# EAGLE board OCU_PCB_Rev3 (EAGLE 9.6.2)
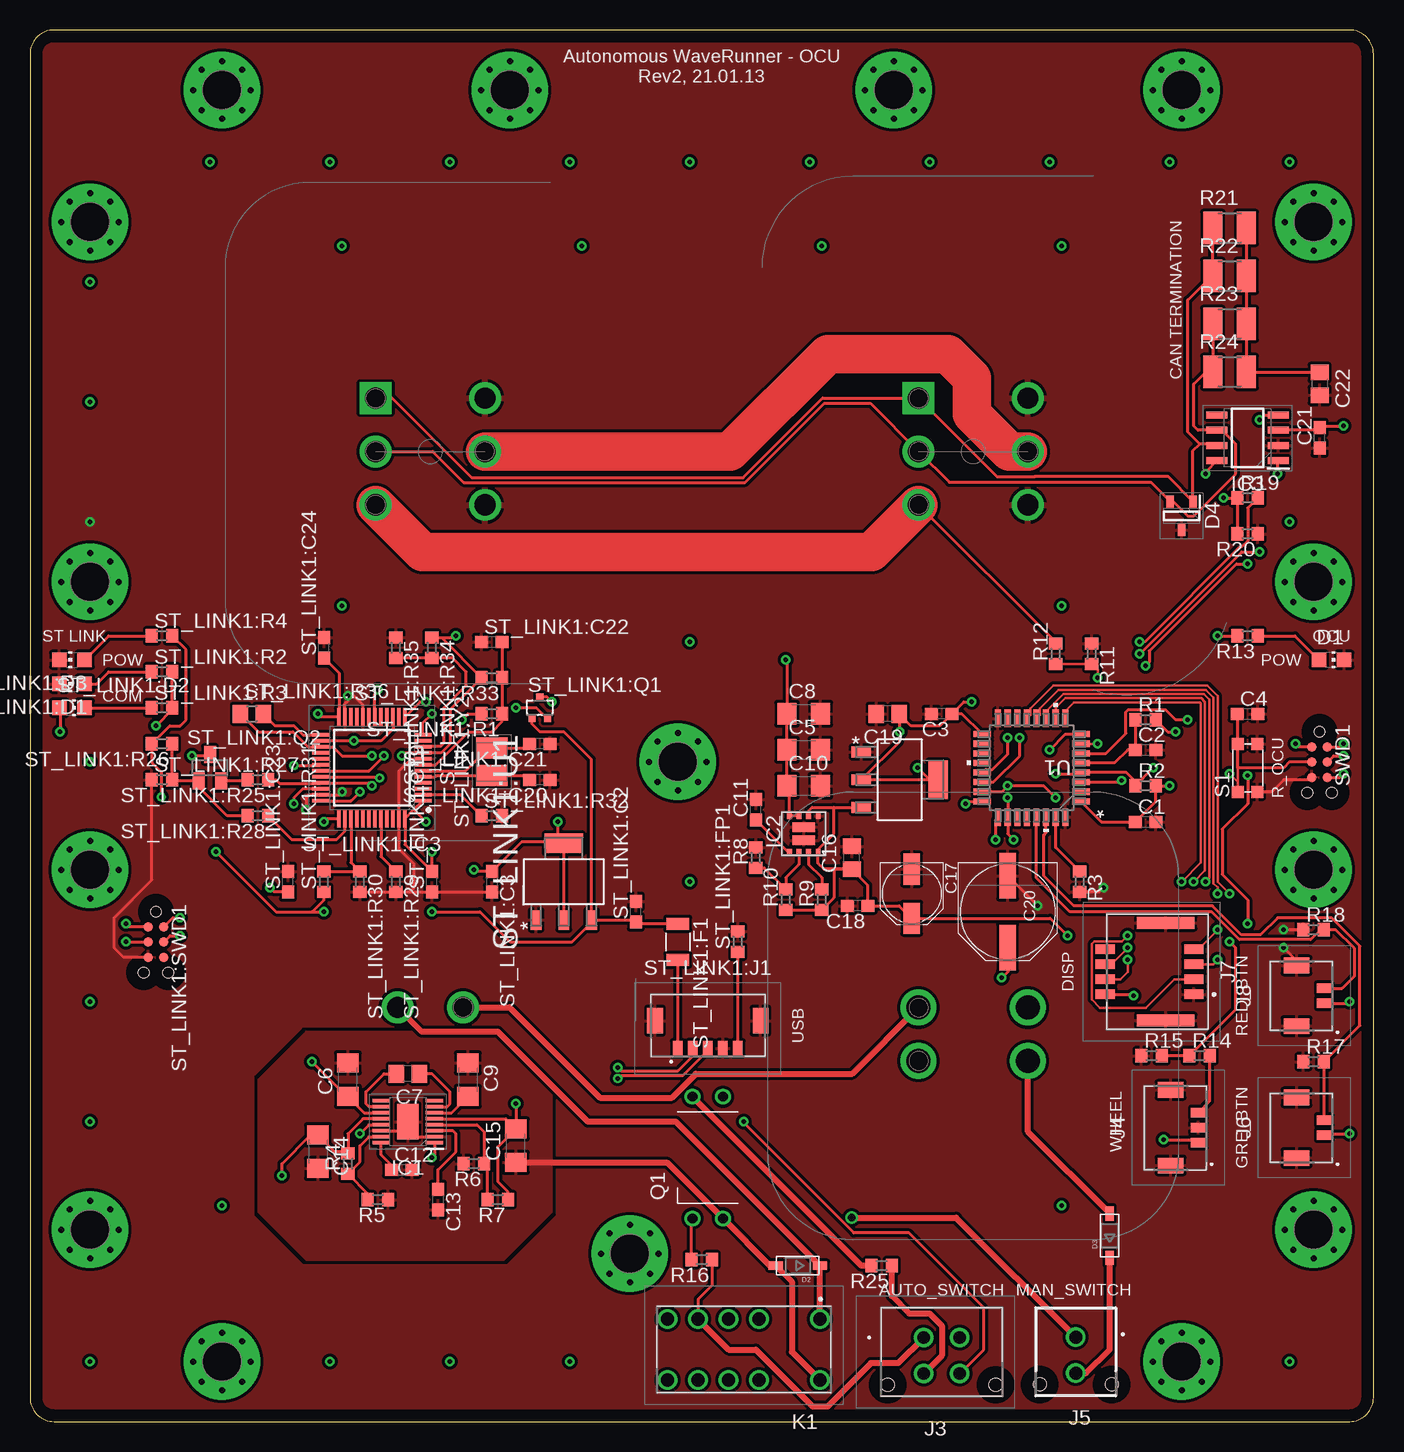
[diagram p0: board, top side]
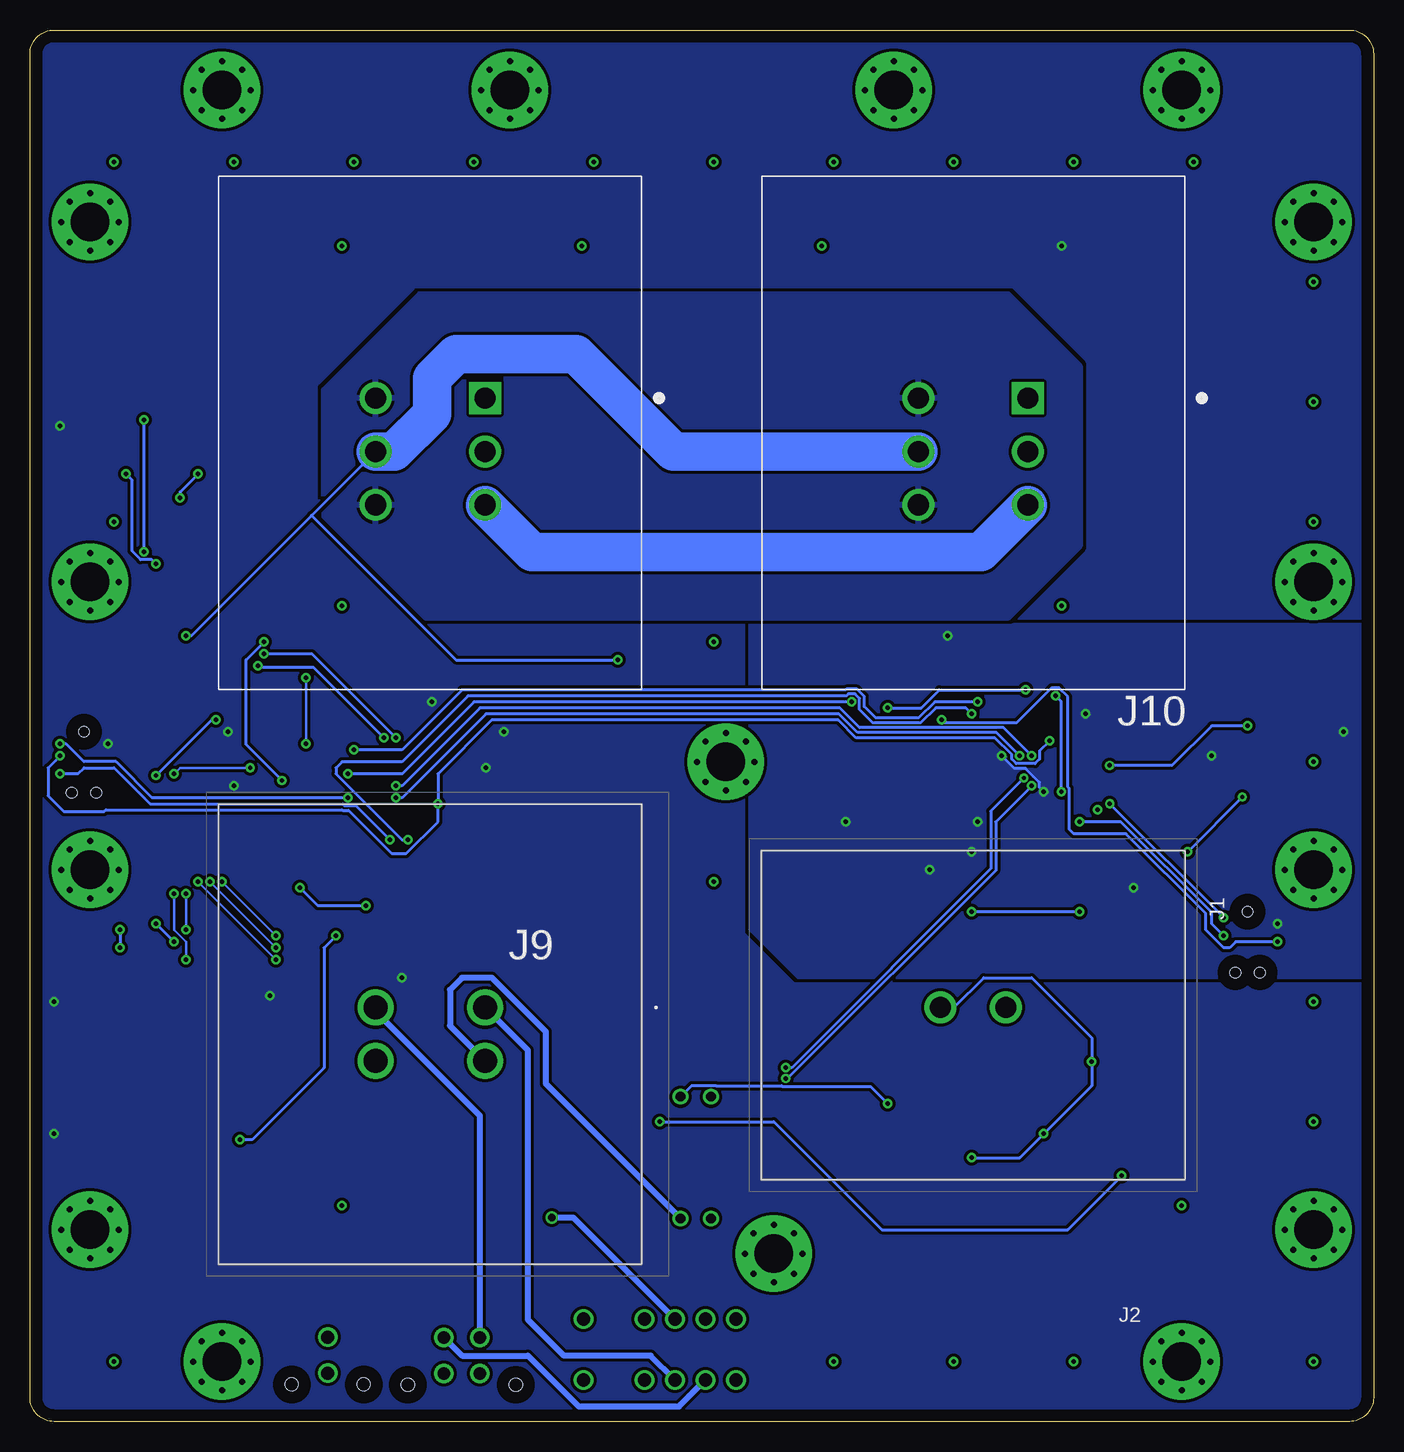
[diagram p1: board, bottom side, seen from below]

Size 112 x 116 mm. Coordinates in mm from the lower left corner, seen from the top.
Outline: 112,114 arc90 110,116 2,116 arc90 0,114 0,2 arc90 2,0 110,0 arc90 112,2 112,114
Copper layers (1*16): Top 0.035mm / dielectric 1.5mm / Bottom 0.035mm
Design rules "default *": minimum track width 6mil, minimum drill 0.35mm, track to track 6mil, track to pad 6mil, pad to pad 6mil, via to via 6mil, smd to smd 6mil, copper to edge 40mil, drill to drill 6mil, minimum pad ring 10mil, minimum via ring 8mil, stop-mask expansion 4mil, vias tented up to drill 0mil, thermal gap 10mil
Net classes: 0 default: width 0.2 mm; 1 DB: width 3.2 mm, clearance 0.254 mm

## Footprints (pad centres in the part's own frame; a part is rotated, then mirrored left to right if it is on the bottom)
C0603 = smd 1.1 x 1: 1 -0.85,0; 2 0.85,0
C1206 = smd 1.6 x 1.8: 1 -1.4,0; 2 1.4,0
C0805 = smd 1.3 x 1.5: 1 -0.95,0; 2 0.95,0
PANASONIC_C = smd 2.6 x 1.4: + 2.05,0; - -2.05,0
PANASONIC_E = smd 3.8 x 1.4: + 3,0; - -3,0
CHIP-LED0805 = smd 1.2 x 1.2: A 0,-1.05; C 0,1.05
SOD-123 = smd 1.2 x 0.7: A 1.85,0; C -1.85,0
SOT96P237X111-3N = smd 1 x 0.6: 1 -1.2,0.955; 2 -1.2,-0.955; 3 1.2,0
M3_MOUNTING_HOLE = drill 0.5 pad 0.8: P$1 -2.4,0; P$2 0,2.4; P$3 2.4,0; P$4 0,-2.4; P$5 -1.697,1.697; P$6 1.697,1.697; P$7 1.697,-1.697; P$8 -1.697,-1.697 | drill 3.2 pad 6.4: P$10 0,0
SOP50P490X110-17N = smd 1.425 x 0.3: 1 -2.212,1.75; 2 -2.212,1.25; 3 -2.212,0.75; 4 -2.212,0.25; 5 -2.212,-0.25; 6 -2.212,-0.75; 7 -2.212,-1.25; 8 -2.212,-1.75; 9 2.212,-1.75; 10 2.212,-1.25; 11 2.212,-0.75; 12 2.212,-0.25; 13 2.212,0.25; 14 2.212,0.75; 15 2.212,1.25; 16 2.212,1.75 | smd 1.753 x 2.947: 17 0,0
SIL0008E = smd 0.45 x 0.4: 1 -1.475,1.2; 2 -1.475,0.4; 3 -1.475,-0.4; 4 -1.475,-1.2; 5 1.475,-1.2; 6 1.475,-0.4; 7 1.475,0.4; 8 1.475,1.2 | smd 0.8 x 1.9: 9 0.55,0; 10 -0.55,0
SOT127P600X175-8N = smd 1.75 x 0.6: 1 -2.55,1.905; 2 -2.55,0.635; 3 -2.55,-0.635; 4 -2.55,-1.905; 5 2.55,-1.905; 6 2.55,-0.635; 7 2.55,0.635; 8 2.55,1.905
DT152P = drill 1.77 pad 2.655: 1 0,0; 2 0,5.46
DT154P = drill 2.01 pad 3.015: 1 0,0; 2 0,4.45; 3 9.12,4.45; 4 9.12,0
430450413 = drill 1.07 pad 1.605: 1 0,0; 2 -3,0; 3 0,3; 4 -3,3 | hole 1.07: -6,3.94; 3,3.94
5055680371 = smd 0.8 x 1.2: 1 -1.25,-1.882; 2 0,-1.882; 3 1.25,-1.882 | smd 1.3 x 2.15: MP1 -3.15,0.412; MP2 3.15,0.412
43045-0213 = drill 1.07 pad 1.62: 1 3.325,2.47; 2 3.325,5.47 | hole 1.07: 0.325,6.41; 6.325,6.41
5055680271 = smd 0.8 x 1.2: 1 -0.625,-1.882; 2 0.625,-1.882 | smd 1.3 x 2.15: MP1 -2.525,0.412; MP2 2.525,0.412
5054330871 = smd 0.8 x 1.6: 1 1.875,3.517; 2 1.875,-3.873; 3 0.625,3.517; 4 0.625,-3.873; 5 -0.625,3.517; 6 -0.625,-3.873; 7 -1.875,3.517; 8 -1.875,-3.873 | smd 1 x 4.8: MP1 4.075,1.177; MP2 -4.075,1.177
TE_DT15-6P = drill 1.77 square: 1 -4.56,-4.45 | drill 1.77: 2 -4.56,0; 3 -4.56,4.45; 4 4.56,4.45; 5 4.56,0; 6 4.56,-4.45
413937885 = drill 1.1 pad 1.65: 1 -6.35,-2.54; 3 -1.27,-2.54; 4 1.27,-2.54; 5 3.81,-2.54; 6 6.35,-2.54; 7 6.35,2.54; 8 3.81,2.54; 9 1.27,2.54; 10 -1.27,2.54; 12 -6.35,2.54
DIL04-400 = drill 0.813 pad 1.3: 1 -1.27,-5.08; 2 1.27,-5.08; 3 1.27,5.08; 4 -1.27,5.08
R0603 = smd 1 x 1.1: 1 -0.85,0; 2 0.85,0
R1210 = smd 1.6 x 2.7: 1 -1.4,0; 2 1.4,0
KMR621NGLFS = smd 1 x 1: 1 -2,-0.8; 2 2,-0.8; 3 -2,0.8; 4 2,0.8
OZCJ = smd 1 x 1.9: 1 -1.5,0; 2 1.5,0
QFP50P900X900X160-48N = smd 1.475 x 0.3: 1 -4.238,2.75; 2 -4.238,2.25; 3 -4.238,1.75; 4 -4.238,1.25; 5 -4.238,0.75; 6 -4.238,0.25; 7 -4.238,-0.25; 8 -4.238,-0.75; 9 -4.238,-1.25; 10 -4.238,-1.75; 11 -4.238,-2.25; 12 -4.238,-2.75; 25 4.238,-2.75; 26 4.238,-2.25; 27 4.238,-1.75; 28 4.238,-1.25; 29 4.238,-0.75; 30 4.238,-0.25; 31 4.238,0.25; 32 4.238,0.75; 33 4.238,1.25; 34 4.238,1.75; 35 4.238,2.25; 36 4.238,2.75 | smd 0.3 x 1.475: 13 -2.75,-4.238; 14 -2.25,-4.238; 15 -1.75,-4.238; 16 -1.25,-4.238; 17 -0.75,-4.238; 18 -0.25,-4.238; 19 0.25,-4.238; 20 0.75,-4.238; 21 1.25,-4.238; 22 1.75,-4.238; 23 2.25,-4.238; 24 2.75,-4.238; 37 2.75,4.238; 38 2.25,4.238; 39 1.75,4.238; 40 1.25,4.238; 41 0.75,4.238; 42 0.25,4.238; 43 -0.25,4.238; 44 -0.75,4.238; 45 -1.25,4.238; 46 -1.75,4.238; 47 -2.25,4.238; 48 -2.75,4.238
5055680571 = smd 0.8 x 1.2: 1 -2.5,-1.882; 2 -1.25,-1.882; 3 0,-1.882; 4 1.25,-1.882; 5 2.5,-1.882 | smd 1.3 x 2.15: MP1 -4.4,0.412; MP2 4.4,0.412
SOT323 = smd 0.6 x 0.55: 1 -0.65,-0.925; 2 0.65,-0.925; 3 0,0.925
SOT23 = smd 1 x 1.4: 1 -0.95,-1.1; 2 0.95,-1.1; 3 0,1.1
R0805 = smd 1.3 x 1.5: 1 -0.95,0; 2 0.95,0
TC2030-IDC-NL = smd 0.787 x 0.787: 1 1.27,-0.635; 2 1.27,0.635; 3 2.54,-0.635; 4 2.54,0.635; 5 3.81,-0.635; 6 3.81,0.635 | hole 0.889: 0,0; 5.08,-1.016; 5.08,1.016
SOT230P700X180-4N = smd 1.626 x 0.889: 1 -3.2,2.311; 2 -3.2,0; 3 -3.2,-2.311 | smd 1.626 x 3.175: 4 3.2,0
RESC3226X100N = smd 1.75 x 2.65: 1 -1.15,0; 2 1.15,0
LQFP-32 = smd 1.473 x 0.508: 1 -4.115,2.8; 2 -4.115,2; 3 -4.115,1.2; 4 -4.115,0.4; 5 -4.115,-0.4; 6 -4.115,-1.2; 7 -4.115,-2; 8 -4.115,-2.8; 17 4.115,-2.8; 18 4.115,-2; 19 4.115,-1.2; 20 4.115,-0.4; 21 4.115,0.4; 22 4.115,1.2; 23 4.115,2; 24 4.115,2.8 | smd 0.508 x 1.473: 9 -2.8,-4.115; 10 -2,-4.115; 11 -1.2,-4.115; 12 -0.4,-4.115; 13 0.4,-4.115; 14 1.2,-4.115; 15 2,-4.115; 16 2.8,-4.115; 25 2.8,4.115; 26 2,4.115; 27 1.2,4.115; 28 0.4,4.115; 29 -0.4,4.115; 30 -1.2,4.115; 31 -2,4.115; 32 -2.8,4.115

## Placement (x,y rotation side)
C1  0.1uF  [C0603]  93,50 0 top
C2  0.1uF  [C0603]  93,56 0 top
C3  0.1uF  [C0603]  76,59 180 top
C4  0.1uF  [C0603]  101.5,59 0 top
C5  10uF  [C1206]  64.5,56 0 top
C6  10uF  [C1206]  26.5,28.5 90 top
C7  1uF  [C0805]  31.5,29 180 top
C8  10uF  [C1206]  64.5,59 0 top
C9  10uF  [C1206]  36.5,28.5 270 top
C10  10uF  [C1206]  64.5,53 0 top
C11  3.3nF  [C0603]  60.5,51 90 top
C12  10nF  [C0603]  31,21 0 top
C13  10nF  [C0603]  34,18.5 270 top
C14  10uF  [C1206]  24,22.5 270 top
C15  10uF  [C1206]  40.5,23 90 top
C16  22uF  [C0805]  68.5,47 90 top
C17  100uF  [PANASONIC_C]  73.5,44 270 top
C18  100nF  [C0603]  69,43 180 top
C19  10uF  [C0805]  71.5,59 180 top
C20  220uF  [PANASONIC_E]  81.5,42.5 270 top
C21  0.1uF  [C0603]  107.5,82 90 top
C22  4.7nF  [C0805]  107.5,86.5 270 top
D1  12V-POW  [CHIP-LED0805]  108.5,63.5 270 top
D2  [SOD-123]  64,13 180 top
D3  [SOD-123]  90,15.5 90 top
D4  SZNUP2105LT1G  [SOT96P237X111-3N]  96,75.5 270 top
HOLE1  M3_MOUNTING_HOLE  [M3_MOUNTING_HOLE]  54,55 0 top
HOLE2  M3_MOUNTING_HOLE  [M3_MOUNTING_HOLE]  5,100 0 top
HOLE3  M3_MOUNTING_HOLE  [M3_MOUNTING_HOLE]  16,111 0 top
HOLE4  M3_MOUNTING_HOLE  [M3_MOUNTING_HOLE]  40,111 0 top
HOLE5  M3_MOUNTING_HOLE  [M3_MOUNTING_HOLE]  72,111 0 top
HOLE6  M3_MOUNTING_HOLE  [M3_MOUNTING_HOLE]  16,5 0 top
HOLE7  M3_MOUNTING_HOLE  [M3_MOUNTING_HOLE]  96,111 0 top
HOLE8  M3_MOUNTING_HOLE  [M3_MOUNTING_HOLE]  107,100 0 top
HOLE9  M3_MOUNTING_HOLE  [M3_MOUNTING_HOLE]  5,70 0 top
HOLE10  M3_MOUNTING_HOLE  [M3_MOUNTING_HOLE]  107,70 0 top
HOLE11  M3_MOUNTING_HOLE  [M3_MOUNTING_HOLE]  96,5 0 top
HOLE12  M3_MOUNTING_HOLE  [M3_MOUNTING_HOLE]  5,46 0 top
HOLE13  M3_MOUNTING_HOLE  [M3_MOUNTING_HOLE]  107,46 0 top
HOLE14  M3_MOUNTING_HOLE  [M3_MOUNTING_HOLE]  5,16 0 top
HOLE15  M3_MOUNTING_HOLE  [M3_MOUNTING_HOLE]  107,16 0 top
HOLE16  M3_MOUNTING_HOLE  [M3_MOUNTING_HOLE]  50,14 0 top
IC1  LTC3260EMSE#PBF  [SOP50P490X110-17N]  31.5,25 180 top
IC2  LMZ21700SILT  [SIL0008E]  64.5,49 90 top
IC3  SN65HVD230DR  [SOT127P600X175-8N]  101.5,82 180 top
J1  DT15-2P  [DT152P]  36.1,34.52 270 bottom
J2  DT15-4P  [DT154P]  74.07,34.51 180 bottom
J3  43045-0413  [430450413]  74.5,7 180 top
J4  505567-0371  [5055680371]  95.5,24.5 90 top
J5  43045-0213  [43045-0213]  90.5,9.5 180 top
J6  505567-0271  [5055680271]  106,24.5 90 top
J7  505433-0871  [5054330871]  93.5,37.5 270 top
J8  505567-0271  [5055680271]  106,35.5 90 top
J9  DT15-6P  [TE_DT15-6P]  78.63,80.86 180 bottom
J10  DT15-6P  [TE_DT15-6P]  33.37,80.86 180 bottom
K1  V23079A1003B301  [413937885]  59.5,6 180 top
Q1  VO618A-3  [DIL04-400]  56.5,22 0 top
R1  BLM18PG471SN1D  [R0603]  93,58.5 0 top
R2  10K  [R0603]  93,53 0 top
R3  10K  [R0603]  87.5,45 270 top
R4  909K  [R0603]  26.5,21.5 90 top
R5  100K  [R0603]  29,18.5 180 top
R6  100K  [R0603]  37,21.5 180 top
R7  909K  [R0603]  39,18.5 180 top
R8  44K2 1%  [R0603]  60.5,47 90 top
R9  10K 1%  [R0603]  66,43.5 90 top
R10  232K 1%  [R0603]  63,43.5 90 top
R11  3K9  [R0603]  88.5,64 270 top
R12  15K  [R0603]  85.5,64 90 top
R13  820R  [R0603]  101.5,65.5 180 top
R14  4K7  [R0603]  97.5,30.5 0 top
R15  9K1  [R0603]  93.5,30.5 0 top
R16  1K5  [R0603]  56,13.5 180 top
R17  10K  [R0603]  107,30 0 top
R18  10K  [R0603]  107,41 0 top
R19  -  [R0603]  101.5,77 0 top
R20  0R  [R0603]  101.5,74 180 top
R21  120R  [R1210]  100,99.5 0 top
R22  120R  [R1210]  100,95.5 0 top
R23  120R  [R1210]  100,91.5 0 top
R24  120R  [R1210]  100,87.5 0 top
R25  0R  [R0603]  71,13 180 top
S1  KMR621NGLFS  [KMR621NGLFS]  101.5,54.5 90 top
ST_LINK1:C2  0.1uF  [C0603]  50.5,42.5 90 top
ST_LINK1:C3  10uF  [C0603]  38.5,45 270 top
ST_LINK1:C19  0.1uF  [C0603]  33.5,45 90 top
ST_LINK1:C20  10pF  [C0603]  42.5,53.5 180 top
ST_LINK1:C21  10pF  [C0603]  42.5,56.5 180 top
ST_LINK1:C22  0.1uF  [C0603]  38.5,65 0 top
ST_LINK1:C23  0.1uF  [C0603]  21.5,45 90 top
ST_LINK1:C24  0.1uF  [C0603]  24.5,64.5 90 top
ST_LINK1:D1  CHIP-LED0805  [CHIP-LED0805]  3.5,61.5 90 top
ST_LINK1:D2  CHIP-LED0805  [CHIP-LED0805]  3.5,59.5 270 top
ST_LINK1:D3  CHIP-LED0805  [CHIP-LED0805]  3.5,63.5 90 top
ST_LINK1:F1  OZCJ0050  [OZCJ]  54,40 270 top
ST_LINK1:FP1  [R0603]  59,40 90 top
ST_LINK1:IC3  STM32F103CBT6TR  [QFP50P900X900X160-48N]  28.5,54.5 180 top
ST_LINK1:J1  505568-0571  [5055680571]  56.5,33 0 top
ST_LINK1:Q1  2N7002PW,115  [SOT323]  42.5,59.5 0 top
ST_LINK1:Q2  BC817  [SOT23]  15,54.5 0 top
ST_LINK1:R1  0  [R0603]  38.5,59 180 top
ST_LINK1:R2  330  [R0603]  11,62.5 0 top
ST_LINK1:R3  330  [R0603]  11,59.5 0 top
ST_LINK1:R4  680  [R0603]  11,65.5 0 top
ST_LINK1:R25  1K5  [R0603]  19,53.5 180 top
ST_LINK1:R26  10K  [R0603]  11,56.5 180 top
ST_LINK1:R27  36K  [R0603]  11,53.5 0 top
ST_LINK1:R28  100  [R0603]  19,50.5 180 top
ST_LINK1:R29  100K  [R0603]  30.5,45 270 top
ST_LINK1:R30  4K7  [R0603]  27.5,45 270 top
ST_LINK1:R31  2K7  [R0603]  24.5,45 90 top
ST_LINK1:R32  10K  [R0603]  38.5,50.5 0 top
ST_LINK1:R33  100K  [R0603]  38.5,62 180 top
ST_LINK1:R34  4K7  [R0603]  33.5,64.5 270 top
ST_LINK1:R35  4K7  [R0603]  30.5,64.5 270 top
ST_LINK1:R36  100  [R0805]  18.5,59 0 top
ST_LINK1:SWD1  SWD_TAGCONNECTNO-LEG  [TC2030-IDC-NL]  10.5,42.5 270 top
ST_LINK1:U1  LD1117S33TR  [SOT230P700X180-4N]  44.5,45 90 top
ST_LINK1:Y2  NX3225GD-8MHZ-STD-CRA-3  [RESC3226X100N]  38.5,55 90 top
SWD1  SWD_TAGCONNECTNO-LEG  [TC2030-IDC-NL]  107.5,57.5 270 top
U1  STM32F303K8  [LQFP-32]  83.5,54.5 180 top
U2  LD1117S33TR  [SOT230P700X180-4N]  72.5,53.5 0 top

## Library data of the parts
C1-C22 R1-R20 R25 ST_LINK1:C2 ST_LINK1:C3 ST_LINK1:C19-ST_LINK1:C24 ST_LINK1:FP1 ST_LINK1:R1-ST_LINK1:R4 ST_LINK1:R25-ST_LINK1:R36 = CASE-RCL
D1 ST_LINK1:D1-ST_LINK1:D3 = CASE-LED
D2 D3 = adafruit
D4 = RescueRunner; DESCRIPTION: Dual Bi-Directional TVS Diode, 350W peak, 3-pin SOT-23; HEIGHT: 1.11mm; MANUFACTURER_NAME: ON Semiconductor; MANUFACTURER_PART_NUMBER: SZNUP2105LT1G; MOUSER_PART_NUMBER: 863-SZNUP2105LT1G; MOUSER_PRICE-STOCK: https://www.mouser.com/Search/Refine.aspx?Keyword=863-SZNUP2105LT1G
HOLE1-HOLE16 J4 J6 J8 = RescueRunner
IC1 = RescueRunner; DESCRIPTION: LTC3260,Charge Pump Inverter,MSOP EP-16 Linear Technology LTC3260EMSE#PBF, Charge Pump Inverting 100mA 550 kHz, -4.5 -32 V, 16-Pin, MSOP; HEIGHT: 1.1mm; MANUFACTURER_NAME: Linear Technology; MANUFACTURER_PART_NUMBER: LTC3260EMSE#PBF; RS_PART_NUMBER: 8516768P; RS_PRICE-STOCK: http://uk.rs-online.com/web/p/products/8516768P
IC2 = RescueRunner; DESCRIPTION: 3V to 17V, 0.65A Step-Down DC/DC Power Module in 3.5mm 3.5mm Package; HEIGHT: mm; MANUFACTURER_NAME: Texas Instruments; MANUFACTURER_PART_NUMBER: LMZ21700SILT; RS_PART_NUMBER: 9009750P; RS_PRICE-STOCK: http://uk.rs-online.com/web/p/products/9009750P
IC3 = RescueRunner; DESCRIPTION: 3.3 V CAN Transceiver with Standby Mode; HEIGHT: 1.75mm; MANUFACTURER_NAME: Texas Instruments; MANUFACTURER_PART_NUMBER: SN65HVD230DR; MOUSER_PART_NUMBER: 595-SN65HVD230DR; MOUSER_PRICE-STOCK: https://www.mouser.com/Search/Refine.aspx?Keyword=595-SN65HVD230DR
J1 = RescueRunner; ALLIED_NUMBER: 70696153; DESCRIPTION: Deutsch DT15 Series, 5.46mm Pitch 2 Way 1 Row Straight PCB Header, Solder Termination; HEIGHT: 30.99mm; MANUFACTURER_NAME: TE Connectivity; MANUFACTURER_PART_NUMBER: DT15-2P; RS_PART_NUMBER: 7242529; RS_PRICE-STOCK: http://uk.rs-online.com/web/p/products/7242529
J2 = RescueRunner; ALLIED_NUMBER: 70696154; DESCRIPTION: Deutsch DT15 Series, 4.44mm Pitch 4 Way 2 Row Straight PCB Header, Solder Termination; HEIGHT: 30.35mm; MANUFACTURER_NAME: TE Connectivity; MANUFACTURER_PART_NUMBER: DT15-4P; RS_PART_NUMBER: 7242532; RS_PRICE-STOCK: http://uk.rs-online.com/web/p/products/7242532
J3 = RescueRunner; ALLIED_NUMBER: 70090720; DESCRIPTION: Micro-Fit 3.0 Vertical Header, 3.00mm Pitch, Dual Row, Circuits, with PCB Polarizing Peg, Tin, Glow-Wire Capable, Black; HEIGHT: 10.16mm; MANUFACTURER_NAME: Molex; MANUFACTURER_PART_NUMBER: 43045-0413; RS_PART_NUMBER: 6700333P; RS_PRICE-STOCK: http://uk.rs-online.com/web/p/products/6700333P
J5 = RescueRunner; ALLIED_NUMBER: 70090781; DESCRIPTION: Header 3.00mm, WTB, dual row, vert,2w Molex MICRO-FIT 3.0 Series, Series Number 43045, 3mm Pitch 2 Way 2 Row Straight PCB Header, Solder Termination, 5A; HEIGHT: mm; MANUFACTURER_NAME: Molex; MANUFACTURER_PART_NUMBER: 43045-0213; RS_PART_NUMBER: 6700305P; RS_PRICE-STOCK: http://uk.rs-online.com/web/p/products/6700305P
J7 = RescueRunner; DESCRIPTION: CONN HEADER SMD 8POS 1.25MM; HEIGHT: 7.25mm; MANUFACTURER_NAME: Molex; MANUFACTURER_PART_NUMBER: 5054330871
J9 J10 = RescueRunner; AVAILABILITY: Unavailable; COMMENT: DT15-6P; DESCRIPTION: DT15 Series, 4.44mm Pitch 6 Way 2 Row Straight PCB Header, Solder Termination; MAXIMUM_PACKAGE_HEIGHT: 15.75mm; MF: TE Connectivity; MP: DT15-6P; PACKAGE: None; PARTREV: C1; PRICE: None; STANDARD: IPC-7351B; TE_PURCHASE_URL: https://www.te.com/usa-en/product-DT15-6P.html?te_bu=Cor&te_type=disp&te_campaign=seda_glo_cor-seda-global-disp-prtnr-fy19-seda-model-bom-cta_sma-317_1&elqCampaignId=32493
K1 = CASE-Relay; DESCRIPTION: DPDT non latch PCB relay, 5A 12Vdc coil; HEIGHT: 9mm; MANUFACTURER_NAME: TE Connectivity; MANUFACTURER_PART_NUMBER: V23079A1003B301; MOUSER_PART_NUMBER: 655-V23079A1003B301; MOUSER_PRICE-STOCK: https://www.mouser.com/Search/Refine.aspx?Keyword=655-V23079A1003B301
Q1 = CASE-Optocoupler
R21-R24 = rcl; SPICEPREFIX: R
S1 = CASE-Switches
ST_LINK1:F1 = CASE-Fuse
ST_LINK1:IC3 = Programming_interface_lib; DESCRIPTION: STMICROELECTRONICS - STM32F103CBT6TR - ARM MCU, STM32 Family STM32F1 Series Microcontrollers, ARM Cortex-M3, 32bit, 72 MHz, 128 KB, 20 KB; HEIGHT: 1.6mm; MANUFACTURER_NAME: STMicroelectronics; MANUFACTURER_PART_NUMBER: STM32F103CBT6TR
ST_LINK1:J1 = Programming_interface_lib; ALLIED_NUMBER: 71085525; DESCRIPTION: Headers & Wire Housings MicroLockPlus 1.25MM VERT HDR SR 5CKT BLK; HEIGHT: 4.05mm; MANUFACTURER_NAME: Molex; MANUFACTURER_PART_NUMBER: 505568-0571; RS_PART_NUMBER: 1615926P; RS_PRICE-STOCK: http://uk.rs-online.com/web/p/products/1615926P
ST_LINK1:Q1 ST_LINK1:Q2 = CASE-Transistors
ST_LINK1:SWD1 SWD1 = CASE-Prog_Header
ST_LINK1:U1 U2 = CASE-Voltage_regulators; MPN: LD1117S33TR; OC_FARNELL: 2253484; OC_NEWARK: 89K0627; PACKAGE: SOT223-3; SUPPLIER: STMicroelectronics
ST_LINK1:Y2 = Programming_interface_lib; DESCRIPTION: A small surface-mount type crystal unit, ideal for an engine control CPU clock; delivering the high reliability that is particularly demanded by automotive; HEIGHT: 1mm; MANUFACTURER_NAME: NDK; MANUFACTURER_PART_NUMBER: NX3225GD-8MHZ-STD-CRA-3; RS_PART_NUMBER: 1847983; RS_PRICE-STOCK: http://uk.rs-online.com/web/p/products/1847983
U1 = CASE-MCU; MANUFACTURER_PART_NUMBER: stm32f303_334kxt; VENDOR: STMicroelectronics

## Nets
12V: C5.1 C8.1 C10.1 IC2.7 IC2.8 J9.5 J10.5 R13.2
+3V3: C1.1 C3.1 C19.1 C20.+ C21.2 IC3.3 J6.1 J7.2 J8.1 R1.2 R2.2 SWD1.1 U1.1 U1.17 U2.2 U2.4
+5V: C16.1 C17.+ C18.1 IC2.4 IC2.6 J4.1 R9.1 R10.1 U2.3
+12V: J9.3 J10.3 R12.2
+24V: C14.1 IC1.12 J3.4 R4.2
BTN_GRE: J6.2 R17.2 U1.30
BTN_RED: J8.2 R18.2 U1.29
CAN_N: D4.2 IC3.6 J9.2 J10.2 R23.1 R24.1
CAN_N1: D4.1 IC3.7 J9.1 J10.1 R21.1 R22.1
D: IC3.1 U1.22
DISP_CS: J7.6 U1.10
DISP_DC: J7.3 U1.9
DISP_DIN: J7.5 U1.13
DISP_RST: J7.7 U1.12
DISP_SCLK: J7.4 U1.11
GND: C1.2 C2.2 C3.2 C4.2 C5.2 C8.2 C10.2 C11.2 C16.2 C17.- C18.2 C19.2 C20.- C21.1 C22.2 D1.C D4.3 IC2.5 IC2.9 IC2.10 IC3.2 J4.2 J4.MP1 J4.MP2 J6.MP1 J6.MP2 J7.1 J7.MP1 J7.MP2 J8.MP1 J8.MP2 J9.4 J9.6 J10.4 J10.6 R3.2 R8.2 R11.1 R15.1 R17.1 R18.1 R20.1 S1.1 S1.2 ST_LINK1:C2.2 ST_LINK1:C3.2 ST_LINK1:C19.1 ST_LINK1:C20.1 ST_LINK1:C21.1 ST_LINK1:C22.1 ST_LINK1:C23.2 ST_LINK1:C24.2 ST_LINK1:D1.C ST_LINK1:D3.C ST_LINK1:FP1.2 ST_LINK1:IC3.8 ST_LINK1:IC3.20 ST_LINK1:IC3.23 ST_LINK1:IC3.35 ST_LINK1:IC3.47 ST_LINK1:J1.4 ST_LINK1:J1.MP1 ST_LINK1:J1.MP2 ST_LINK1:R27.1 ST_LINK1:R29.2 ST_LINK1:R30.2 ST_LINK1:R32.2 ST_LINK1:R35.1 ST_LINK1:SWD1.5 ST_LINK1:U1.1 SWD1.5 U1.16 U1.32 U2.1
GNDA: C15.2 IC1.5 Q1.3 R7.1
MAN_S_IN: J5.1 K1.4
MAN_S_OUT: J2.4 J3.1 K1.5 R16.1
MODE_LED: J3.3 R25.1
N$1: J4.3 R14.2
N$2: C7.1 IC1.7
N$3: C7.2 IC1.10
N$4: C22.1 R21.2 R22.2 R23.2 R24.2
N$5: IC2.2 R8.1 R10.2
N$6: C11.1 IC2.1
N$7: C12.1 IC1.16
N$8: C13.1 IC1.3
N$9: D3.C J5.2
N$10: D1.A R13.1
N$11: IC2.3 R9.2
N$12: J3.2 K1.8
N$13: C9.2 IC1.6
N$14: IC1.15 R4.1 R5.2
N$15: IC3.8 R19.1 R20.2
N$16: IC1.4 R6.1 R7.2
N$17: Q1.4 R25.2
N$18: D3.A J2.3
N$22: Q1.1 R16.2
N$24: D2.C J1.2 K1.1
N$26: C2.1 R1.1 U1.5
N$27: R3.1 U1.31
NRST: C4.1 R2.1 S1.3 S1.4 ST_LINK1:Q1.3 SWD1.3 U1.4
R: IC3.4 U1.21
RS: R19.2 U1.3
RX2: ST_LINK1:IC3.12 U1.25
S_12V: C6.1 IC1.1 IC1.11 IC1.13 J1.1 J2.1 K1.9
S_GND: C6.2 C9.1 C12.2 C13.2 C14.2 C15.1 D2.A IC1.2 IC1.14 IC1.17 J2.2 K1.12 Q1.2 R5.1 R6.2
ST_LINK1:+3V3: ST_LINK1:C3.1 ST_LINK1:C19.2 ST_LINK1:C23.1 ST_LINK1:C24.1 ST_LINK1:D2.A ST_LINK1:IC3.1 ST_LINK1:IC3.9 ST_LINK1:IC3.24 ST_LINK1:IC3.36 ST_LINK1:IC3.48 ST_LINK1:Q2.3 ST_LINK1:R33.2 ST_LINK1:R34.1 ST_LINK1:SWD1.1 ST_LINK1:U1.2 ST_LINK1:U1.4
ST_LINK1:+5V: ST_LINK1:C2.1 ST_LINK1:F1.1 ST_LINK1:Q1.1 ST_LINK1:R4.2 ST_LINK1:R26.2 ST_LINK1:R31.1 ST_LINK1:U1.3
ST_LINK1:N$1: ST_LINK1:D1.A ST_LINK1:R2.1
ST_LINK1:N$2: ST_LINK1:D3.A ST_LINK1:R4.1
ST_LINK1:N$3: ST_LINK1:D2.C ST_LINK1:R3.1
ST_LINK1:N$4: ST_LINK1:FP1.1 ST_LINK1:J1.5
ST_LINK1:N$7: ST_LINK1:Q2.2 ST_LINK1:R25.2
ST_LINK1:N$8: ST_LINK1:Q2.1 ST_LINK1:R26.1 ST_LINK1:R27.2 ST_LINK1:R28.2
ST_LINK1:N$15: ST_LINK1:IC3.39 ST_LINK1:R30.1 ST_LINK1:R31.2
ST_LINK1:N$16: ST_LINK1:IC3.2 ST_LINK1:R32.1
ST_LINK1:N$21: ST_LINK1:IC3.44 ST_LINK1:R29.1
ST_LINK1:N$22: ST_LINK1:C20.2 ST_LINK1:IC3.5 ST_LINK1:Y2.1
ST_LINK1:N$23: ST_LINK1:IC3.10 ST_LINK1:R34.2 ST_LINK1:R35.2
ST_LINK1:N$24: ST_LINK1:C21.2 ST_LINK1:IC3.6 ST_LINK1:Y2.2
ST_LINK1:N$25: ST_LINK1:C22.2 ST_LINK1:IC3.7 ST_LINK1:R1.1 ST_LINK1:R33.1
ST_LINK1:N$26: ST_LINK1:IC3.25 ST_LINK1:R36.2
ST_LINK1:N$27: ST_LINK1:F1.2 ST_LINK1:J1.1
ST_LINK1:NRST: ST_LINK1:IC3.18 ST_LINK1:Q1.2
ST_LINK1:STLK_LED: ST_LINK1:IC3.30 ST_LINK1:R2.2 ST_LINK1:R3.2
ST_LINK1:STM_NRST: ST_LINK1:R1.2 ST_LINK1:SWD1.3
ST_LINK1:STM_SWCLK: ST_LINK1:IC3.37 ST_LINK1:SWD1.4
ST_LINK1:STM_SWDIO: ST_LINK1:IC3.34 ST_LINK1:SWD1.2
ST_LINK1:USB_D_N: ST_LINK1:IC3.32 ST_LINK1:J1.2
ST_LINK1:USB_D_P: ST_LINK1:IC3.33 ST_LINK1:J1.3 ST_LINK1:R25.1
ST_LINK1:USB_RENUM: ST_LINK1:IC3.38 ST_LINK1:R28.1
STM_12_INDIC: R11.2 R12.1 U1.7
SWDCLK: ST_LINK1:IC3.15 ST_LINK1:IC3.26 SWD1.4 U1.24
SWDIO: ST_LINK1:IC3.27 ST_LINK1:R36.1 SWD1.2 U1.23
SWO: ST_LINK1:IC3.31 SWD1.6 U1.26
TX2: ST_LINK1:IC3.13 U1.8
WHEEL: R14.1 R15.2 U1.6

## Tracks (layer width: path | path; a pad name or v marks a point on that pad's centre or on a via)
12V  (via drill 0.35)
  Top 0.25: v99,65.5 R13.2 | v63,63.5 63.1,63.4 C8.1 C5.1 C10.1 63.3,52.8 IC2.8 IC2.7
  Top 3.2: J10.5 58.36,80.86 66.5,89 76.5,89 78.5,87 78.5,84 81.64,80.86 J9.5
  Bottom 0.25: J9.5 88.53,75.53 | 88.53,75.53 98.55,65.5 v99,65.5 | 88.53,75.53 76.5,63.5 v63,63.5
  Bottom 3.2: J10.5 58.36,80.86 66.5,89 76.5,89 78.5,87 78.5,84 81.64,80.86 J9.5
+3V1  (via drill 0.35)
  other vias: 46,98
+3V2  (via drill 0.35)
  other vias: 66,98
+3V3  (via drill 0.35)
  Top 0.25: IC3.3 107.28,82.64 C21.2 107.65,83 v109.5,83 | SWD1.1 105.77,56.23 v105.5,56.5 | v95,53 R2.2 93.85,51.7 C1.1 89.31,50 U1.1 | U1.17 77.69,59 C3.1 | C3.1 77.85,60 v78.5,60 | C3.1 75.85,58 73.45,58 C19.1 72.5,58.95 v72.5,57.5 72.5,56.7 69.4,53.6 | U2.2 69.4,53.6 | 69.4,53.6 69.5,53.5 U2.4 75,53.5 v74,54.5 | C20.+ 81.5,37.5 v81,37 | J7.2 91.88,35.62 v92,35.5 | J6.1 108.01,24 v110,24 | J8.1 109.88,34.88 v110,35 | R1.2 94.85,57.5 v95.5,57.5
  other vias: 26,98
  pour Bottom (isolate 0.254, rank 3): -1.5,-2 -1.5,116 0,117.5 113.5,117.5 116.5,114.5 116.5,-1 115.5,-2
+3V4  (via drill 0.35)
  other vias: 86,98
+3V5  (via drill 0.35)
  other vias: 16,18
+3V6  (via drill 0.35)
  other vias: 86,68
+3V7  (via drill 0.35)
  other vias: 26,68
+3V8  (via drill 0.35)
  other vias: 86,18
+5V  (via drill 0.35)
  Top 0.25: C16.1 66.17,46.05 65.7,46.52 IC2.4 65.7,47.7 67,49 67,51.19 | IC2.6 64.9,50.9 65.19,51.19 67,51.19 | 67,51.19 U2.3 | C16.1 69.85,44.7 C18.1 72.45,43 C17.+ 85.05,41.95 v86.5,40.5 | R10.1 R9.1 67,43.65 67,46.05 C16.1 | v94.5,23.5 97.13,23.5 J4.1
  Bottom 0.25: v86.5,40.5 87.5,39.5 87.5,29.5 93.5,23.5 v94.5,23.5
+12V
  Top 0.25: J9.3 85.5,64.98 R12.2
  Top 3.2: J10.3 32.73,72.5 70.16,72.5 J9.3
  Bottom 3.2: J10.3 32.73,72.5 70.16,72.5 J9.3
+24V  (via drill 0.35)
  Top 0.25: IC1.12 27.75,25.25 26.5,24 R4.2 26.35,22.5 25.4,22.5 C14.1 23.4,23.9 21,21.5 v21,20.5 | J3.4 79.5,6 79.5,9.5 73.28,15.72 68.68,15.72 59.5,24.9 v59.5,25
  Bottom 0.25: v59.5,25 50,25 41,16 25.5,16 v21,20.5
BTN_GRE
  Top 0.25: J6.2 107.88,29.97 R17.2 110.86,33.01 110.86,39.64 108.5,42 104,42 102.58,40.58 100.99,40.58 98.57,43 87,43 84.5,45.5 84.5,48.9 84.7,49.1 U1.30
BTN_RED
  Top 0.25: J8.2 109.38,36.12 110.38,37.12 110.38,39.47 108.85,41 R18.2 107.59,41 106.77,40.17 100.83,40.17 98.5,42.5 86.71,42.5 83.9,45.31 U1.29
CAN_N
  Top 0.25: J10.2 33.57,80.86 36.15,78.28 59.61,78.28 66.21,84.89 70.04,84.89 J9.2 76.63,78.3 93.44,78.3 D4.2 95.3,76.7 96.5,75.5 97,75.5 100.5,79 100.5,81.5 99.37,82.64 IC3.6 97.37,82.64 97,83 97,86.5 98,87.5 R24.1 R23.1
CAN_N1
  Top 0.25: J10.1 30.19,85.31 36.81,78.69 59.44,78.69 66.07,85.31 J9.1 80.59,78.78 83.77,78.78 83.78,78.8 94.85,78.8 D4.1 96.95,80.95 97.5,81.5 | R21.1 R22.1 98.5,95.5 96.5,93.5 96.5,82.5 97.5,81.5 | IC3.7 98.81,81.5 97.5,81.5
D  (via drill 0.35)
  Top 0.25: U1.22 80.3,53.3 82.5,55.5 v82.5,57 | v93,63 93.3,63.3 93.3,64.23 100.57,71.5 v101.5,71.5 | v104,79 104,80.05 IC3.1
  Bottom 0.25: v82.5,57 88.34,62.84 92.84,62.84 v93,63 | v101.5,71.5 101.84,71.84 102.77,71.84 103.5,72.57 103.5,78.5 v104,79
DISP_CS  (via drill 0.35)
  Top 0.2: U1.10 85.5,59.5 86.29,60.3 97.65,60.3 97.94,60 97.94,45.94 v97,45 | v91.5,39.5 90.12,38.12 J7.6
  Bottom 0.2: v97,45 v91.5,39.5
DISP_DC  (via drill 0.35)
  Top 0.2: U1.9 86.3,59.24 87,59.94 97.5,59.94 97.59,59.85 97.59,46.59 v96,45 | v91.5,40.5 91.03,40.03 88.72,40.03 88.5,39.8 88.5,35.2 89.19,34.5 93,34.5 95.38,36.88 J7.3
  Bottom 0.2: v96,45 v91.5,40.5
DISP_DIN  (via drill 0.35)
  Top 0.2: U1.13 83.39,58.91 83.39,59.46 85.31,61.37 98.13,61.37 99,60.5 99,45 v100,44 | v99,38.5 98.62,38.12 J7.5
  Bottom 0.2: v100,44 100,41 99,40 v99,38.5
DISP_RST  (via drill 0.35)
  Top 0.2: U1.12 84.19,58.91 84.19,59.46 85.74,61 98,61 98.65,60.35 98.65,44.85 99,44.5 v99,44 | v99,41 97.38,39.38 J7.7
  Bottom 0.2: v99,44 v99,41
DISP_SCLK  (via drill 0.35)
  Top 0.2: U1.11 84.7,59.2 86.15,60.65 97.85,60.65 98.3,60.2 98.3,45.3 v98,45 | v91.5,38.5 91.5,37.5 90.88,36.88 J7.4
  Bottom 0.2: v98,45 v91.5,38.5
GND  (via drill 0.35)
  Top 0.25: v26.03,52.5 25.78,52.25 ST_LINK1:IC3.35 23.25,52.25 23,52 v23,51 | ST_LINK1:IC3.23 26.2,58.79 26.2,59.8 26.5,60.1 v26.5,60.5 27,60.5 27.75,59.75 ST_LINK1:IC3.20 | ST_LINK1:SWD1.5 7.81,38.69 7,39.5 7,42 10.15,45.15 ST_LINK1:R27.1 | SWD1.5 106.67,53.5 104.5,53.5 103.5,52.5 S1.1 | R18.1 v104.5,41 | v104.5,39.5 105.59,38.41 J8.MP2 | C20.- v84,43 | v89.5,44.5 89.15,44.15 R3.2 | ST_LINK1:IC3.8 31.75,55.25 30.75,54.25 ST_LINK1:IC3.47 30.75,47.75 32,46.5 32,44.5 31.65,44.15 | 31.65,44.15 ST_LINK1:R29.2 ST_LINK1:R30.2 | 31.65,44.15 ST_LINK1:C19.1 ST_LINK1:C3.2
  Bottom 0.25: v26.03,52.5 26.03,60.03 v26.5,60.5 | v104.5,41 v104.5,39.5 | v84,43 88,43 v89.5,44.5
  other vias: 5,75
  pour Top (isolate 0.254, rank 2): -1.5,-2 -1.5,116 0,117.5 113.5,117.5 116.5,114.5 116.5,-1 115.5,-2
  pour Bottom (isolate 0.254): 24.5,88 24.5,73 30.5,67 79,67 87.5,75.5 87.5,86 79.5,94 30.5,94
  pour Top (isolate 0.254): 24.5,88 30.5,94 79.5,94 87.5,86 87.5,75.5 79,67 30.5,67 24.5,73
GND1  (via drill 0.35)
  other vias: 5,85
GND2  (via drill 0.35)
  other vias: 5,95
GND3  (via drill 0.35)
  other vias: 5,55
GND4  (via drill 0.35)
  other vias: 5,35
GND5  (via drill 0.35)
  other vias: 5,25
GND6  (via drill 0.35)
  other vias: 5,5
GND7  (via drill 0.35)
  other vias: 25,5
GND8  (via drill 0.35)
  other vias: 35,5
GND9  (via drill 0.35)
  other vias: 45,5
GND10  (via drill 0.35)
  other vias: 105,5
GND11  (via drill 0.35)
  other vias: 105,105
GND12  (via drill 0.35)
  other vias: 105,75
GND13  (via drill 0.35)
  other vias: 85,105
GND14  (via drill 0.35)
  other vias: 75,105
GND15  (via drill 0.35)
  other vias: 65,105
GND16  (via drill 0.35)
  other vias: 55,105
GND17  (via drill 0.35)
  other vias: 45,105
GND18  (via drill 0.35)
  other vias: 35,105
GND19  (via drill 0.35)
  other vias: 25,105
GND20  (via drill 0.35)
  other vias: 15,105
GND21  (via drill 0.35)
  other vias: 95,105
GND22  (via drill 0.35)
  other vias: 55,65
GND23  (via drill 0.35)
  other vias: 55,45
GNDA  (via drill 0.35)
  Top 0.25: IC1.5 39.65,25.25 40.45,24.45 | R7.1 39.85,19.15 39,20 39,22.9 C15.2 40.45,24.45 | v40.5,26.5 40.5,24.5 40.45,24.45
  Bottom 0.25: Q1.3 56.83,28.02 54.84,28.02 54.82,28 49.34,28 49.27,27.94 41.94,27.94 v40.5,26.5
MAN_S_IN  (via drill 0.6)
  Top 0.5: v68.5,17 77.2,17 J5.1
  Bottom 0.5: K1.4 66.69,17 v68.5,17
MAN_S_OUT
  Top 0.25: R16.1 56.85,11.35 55.69,10.19 K1.5
  Top 0.5: K1.5 58.23,6 60.5,6 65.23,1.27 66.5,1.27 70.09,4.86 72.36,4.86 J3.1
  Bottom 0.5: J3.1 74.5,25.5 83.19,34.19 J2.4
MODE_LED
  Top 0.5: J3.3 76,5.5 76,8 75,9 73.31,9 71.85,10.46 R25.1
N$1
  Top 0.25: J4.3 98.35,26.72 R14.2
N$2
  Top 0.25: IC1.7 34.75,26.25 35,26.5 35,27.5 33.5,29 C7.1
N$3
  Top 0.25: IC1.10 28.25,26.25 28,26.5 28,27.5 29.5,29 C7.2
N$4
  Top 0.25: R21.2 R22.2 R23.2 R24.2 107.45,87.5 C22.1
N$5
  Top 0.25: R8.1 61.2,46.15 R10.2 63,45.35 64.1,46.45 IC2.2
N$6
  Top 0.25: C11.1 63.12,47.52 IC2.1
N$7
  Top 0.25: C12.1 30.15,21.35 29.29,22.21 IC1.16
N$8
  Top 0.25: C13.1 34,21 35.5,22.5 35.5,24 35.25,24.25 IC1.3
N$9
  Top 0.5: J5.2 88.03,4.03 90,6 D3.C
N$10
  Top 0.25: R13.1 105.45,65.5 D1.A
N$11
  Top 0.25: IC2.3 64.9,46.45 66,45.35 R9.2
N$12
  Bottom 0.5: K1.8 57.88,1.27 66.27,1.27 70.5,5.5 76,5.5 J3.2
N$13
  Top 0.25: IC1.6 35.15,25.75 C9.2
N$14
  Top 0.25: R5.2 28.15,19 R4.1 27.5,21.65 27.5,23 28.25,23.75 IC1.15
N$15  (via drill 0.35)
  Top 0.25: IC3.8 98,79.14 v98,79 | v99.5,77 R19.1 R20.2
  Bottom 0.25: v98,79 99.5,77.5 v99.5,77
N$16
  Top 0.25: IC1.4 37.25,24.75 37.85,24.15 R6.1 38.15,21.2 R7.2
N$17
  Top 0.5: R25.2 69.31,13 Q1.4
N$18
  Top 0.5: D3.A 83.19,24.16 J2.3
N$22
  Top 0.25: R16.2 55.15,16.84 Q1.1
N$24
  Top 0.5: K1.1 D2.C 53.85,25 46.5,25 39,32.5 32.66,32.5 J1.2
N$26
  Top 0.25: U1.5 90.4,54.9 91.5,56 C2.1 R1.1
N$27
  Top 0.25: R3.1 85.5,47.85 U1.31
NRST  (via drill 0.35)
  Top 0.2: 100.7,54.5 S1.3 100.7,53.3 v100,54 | 93.58,54.42 v93.65,54.5
  Top 0.25: ST_LINK1:Q1.3 43.08,60.42 v43.5,60 | v85.5,54 87.52,54 U1.4 91.4,54.1 92.15,53.35 R2.1 93.58,54.42 | C4.1 100.65,56.55 S1.4 100.7,54.5 104.5,54.5 104.96,54.96 SWD1.3
  Bottom 0.2: v93.65,54.5 99.5,54.5 v100,54
  Bottom 0.25: v43.5,60 75,60 81,54 v85.5,54
R  (via drill 0.35)
  Top 0.25: U1.21 79.65,54.37 80.24,54.37 81.5,55.63 v81.5,57 | v92.5,64 101,72.5 v102.5,72.5 | v102.5,83.5 102.91,83.91 IC3.4
  Bottom 0.25: v81.5,57 88.5,64 v92.5,64 | v102.5,72.5 v102.5,83.5
RS  (via drill 0.35)
  Top 0.25: R19.2 101.5,76.15 101.5,73.41 101,72.9 100.83,72.9 92.93,65 v92.5,65 | U1.3 90.86,53.3 v91,53.44
  Bottom 0.25: v92.5,65 94,63.5 94,56.44 v91,53.44
RX2  (via drill 0.35)
  Top 0.25: ST_LINK1:IC3.12 32.74,58.24 v33.5,59 | v80.5,48.5 80.5,50.19 U1.25
  Bottom 0.25: v33.5,59 34,59.5 36.5,59.5 37.75,58.25 41.75,58.25 42.84,59.34 42.84,60.27 43.23,60.66 43.77,60.66 43.93,60.5 75.5,60.5 81,55 86,55 86.5,54.5 86.5,54 81,48.5 v80.5,48.5
S_12V  (via drill 0.35)
  Top 0.25: IC1.11 27.85,25.75 C6.1 26.4,27.1 v23.5,30 | v27.5,24 28.25,24.75 IC1.13 | IC1.1 33.71,22.21 v33.5,22
  Top 0.5: J1.1 39.98,34.52 47.5,27 53.5,27 55.5,29 68.56,29 J2.1
  Bottom 0.25: J1.1 34.98,34.52 32.5,37 28.5,37 23.5,32 v23.5,30 23.5,28 v27.5,24 29.5,22 v33.5,22
  Bottom 0.5: K1.9 60.27,5.5 67.5,5.5 70.5,8.5 70.5,30.94 J2.1
S_GND
  Top 0.25: IC1.14 30.75,24.25 | IC1.2 31.25,23.75 30.75,24.25 | IC1.17 30.75,24.25
  Top 0.5: K1.12 63.5,5.81 63.5,11.65 D2.A 61.69,13 Q1.2 53.09,21.6 C15.1
  Bottom 0.5: Q1.2 69,28.15 69,32.5 73.5,37 76,37 77,36 77,32.99 J2.2
  pour Top (isolate 0.254): 19,17.5 23,13.5 39.5,13.5 43.5,17.5 43.5,28 39,32.5 23,32.5 19,28.5
ST_LINK1:+3V3  (via drill 0.35)
  Top 0.25: ST_LINK1:C24.1 25.75,62.4 ST_LINK1:IC3.24 24.26,58.74 v24,59 | 31.99,51.01 ST_LINK1:IC3.48 31.25,48.1 ST_LINK1:C19.2 v33.5,47.5 | 31.99,51.01 ST_LINK1:IC3.1 | 31.99,51.01 v33,50 | ST_LINK1:Q2.3 14.9,55.5 v13.5,55.5 | ST_LINK1:IC3.36 26.75,51.75 v27.5,52.5 | ST_LINK1:C23.1 20.35,44.15 v20,44.5 | v31,55.5 31.25,55.75 ST_LINK1:IC3.9 34.25,55.75 35,56.5 35,59.35 ST_LINK1:R33.2 34.3,65.35 ST_LINK1:R34.1 35.35,65.35 v35.5,65.5 | 44.35,48.35 ST_LINK1:U1.4 ST_LINK1:U1.2 | 44.35,48.35 44,48.7 v44,50 | 44.35,48.35 41,48.35 ST_LINK1:C3.1 37.15,45.85 v37,46 | ST_LINK1:SWD1.1 8.27,41.23 v8,41.5 | ST_LINK1:D2.A 2.5,59.45 v2.5,57.5
  Bottom 0.25: v27.5,52.5 27.84,52.84 27.84,53.27 29.02,54.44 29.94,54.44 v31,55.5
  pour Bottom (isolate 0.254, rank 2): 30.5,66.5 0,66.5 0,39.5 0,37 48,37 52,41 52,66.5
ST_LINK1:+5V  (via drill 0.35)
  Top 0.25: ST_LINK1:R4.2 13,64.35 13,58.5 12.5,58 11.65,58 ST_LINK1:R26.2 10.15,54.94 10.93,54.16 v10.93,52.07 | 47,41.8 ST_LINK1:U1.3 46.81,55.19 44.5,57.5 42.5,57.5 41.85,58.15 ST_LINK1:Q1.1 | 47,41.8 50.35,41.8 ST_LINK1:C2.1 50.65,41.5 ST_LINK1:F1.1 | 23.5,42.5 24.5,43.5 ST_LINK1:R31.1 | 47,41.8 45.2,40 40,40 37.5,42.5 v33.5,42.5 | v15.5,47.5 20.5,42.5 23.5,42.5 | 23.5,42.5 v24.5,42.5
  Bottom 0.25: v10.93,52.07 v15.5,47.5 | v24.5,42.5 v33.5,42.5
ST_LINK1:N$1
  Top 0.25: ST_LINK1:D1.A 5.55,61.5 6.55,62.5 ST_LINK1:R2.1
ST_LINK1:N$2
  Top 0.25: ST_LINK1:D3.A 6.55,65.5 ST_LINK1:R4.1
ST_LINK1:N$3
  Top 0.25: ST_LINK1:D2.C ST_LINK1:R3.1
ST_LINK1:N$4
  Top 0.25: ST_LINK1:J1.5 ST_LINK1:FP1.1
ST_LINK1:N$7
  Top 0.25: ST_LINK1:R25.2 18.05,53.4 ST_LINK1:Q2.2
ST_LINK1:N$8
  Top 0.25: ST_LINK1:R26.1 ST_LINK1:R27.2 11.95,53.4 ST_LINK1:Q2.1 14.05,52.9 16.45,50.5 ST_LINK1:R28.2
ST_LINK1:N$15
  Top 0.25: ST_LINK1:IC3.39 26.75,46.6 ST_LINK1:R30.1 ST_LINK1:R31.2
ST_LINK1:N$16
  Top 0.25: ST_LINK1:R32.1 35.9,52.25 ST_LINK1:IC3.2
ST_LINK1:N$21
  Top 0.25: ST_LINK1:IC3.44 29.25,47.1 ST_LINK1:R29.1
ST_LINK1:N$22
  Top 0.25: ST_LINK1:IC3.5 33.75,53.75 33.85,53.85 37.85,53.85 38,54 38.35,54 ST_LINK1:Y2.1 41.3,53.85 ST_LINK1:C20.2
ST_LINK1:N$23
  Top 0.25: ST_LINK1:R35.2 ST_LINK1:R34.2 35.22,63.65 36.37,62.5 36.37,61.37 34.5,59.5 34.5,56.57 34.25,56.32 32.81,56.32 ST_LINK1:IC3.10
ST_LINK1:N$24
  Top 0.25: ST_LINK1:IC3.6 36.31,54.25 37.5,55.44 37.5,55.5 38.15,56.15 ST_LINK1:Y2.2 41.3,56.15 ST_LINK1:C21.2
ST_LINK1:N$25
  Top 0.25: ST_LINK1:C22.2 ST_LINK1:R33.1 ST_LINK1:R1.1 39.35,58.35 38.5,57.5 36.57,57.5 33.82,54.75 ST_LINK1:IC3.7
ST_LINK1:N$26
  Top 0.25: ST_LINK1:R36.2 20.45,58 22,58 22.75,57.25 ST_LINK1:IC3.25
ST_LINK1:N$27
  Top 0.25: ST_LINK1:J1.1 ST_LINK1:F1.2
ST_LINK1:NRST  (via drill 0.35)
  Top 0.25: ST_LINK1:Q1.2 42.23,59.5 v40.5,59.5 | v29,61 29,60.9 28.7,60.6 28.7,58.79 ST_LINK1:IC3.18
  Bottom 0.25: v29,61 36.2,61 37.7,59.5 v40.5,59.5
ST_LINK1:STLK_LED  (via drill 0.35)
  Top 0.25: ST_LINK1:R2.2 ST_LINK1:R3.2 11.85,59.35 v10.5,58 | v22,54.7 24.21,54.7 ST_LINK1:IC3.30
  Bottom 0.25: v10.5,58 13.5,58 16.8,54.7 v22,54.7
ST_LINK1:STM_NRST  (via drill 0.35)
  Top 0.25: v8,40 9.83,40 ST_LINK1:SWD1.3 | v36,58.5 36.5,59 ST_LINK1:R1.2
  Bottom 0.25: v8,40 11.5,40 12,39.5 12.5,39.5 14,41 14,42.37 20.63,49 25,49 25.38,49.37 25.38,52.77 25.5,52.9 25.5,60.43 26.23,61.16 26.84,61.16 29.75,58.25 35.75,58.25 v36,58.5
ST_LINK1:STM_SWCLK  (via drill 0.35)
  Top 0.25: ST_LINK1:SWD1.4 11.67,40.5 v12.5,40.5 | v24.5,50 24.76,50.26 ST_LINK1:IC3.37
  Bottom 0.25: v12.5,40.5 13.5,41.5 13.5,42.44 21.06,50 v24.5,50
ST_LINK1:STM_SWDIO  (via drill 0.35)
  Top 0.25: ST_LINK1:IC3.34 22.74,52.75 21.99,52 v21.99,51.5 | ST_LINK1:SWD1.2 11.91,42 v12.5,42
  Bottom 0.25: v21.99,51.5 v12.5,42.01 v12.5,42
ST_LINK1:USB_D_N  (via drill 0.35)
  Top 0.25: v29.14,53.64 29.04,53.75 ST_LINK1:IC3.32 | v49,29.5 49.25,29.25 54,29.25 55.25,30.5 ST_LINK1:J1.2
  Bottom 0.25: v29.14,53.64 31.9,50.88 31.9,46.1 48.5,29.5 v49,29.5
ST_LINK1:USB_D_P  (via drill 0.35)
  Top 0.25: ST_LINK1:R25.1 20.5,53.5 20.8,53.2 24.21,53.2 ST_LINK1:IC3.33 28.25,53.25 v28.5,53 | v49,28.59 49.25,28.84 54.43,28.84 56.5,30.92 ST_LINK1:J1.3
  Bottom 0.25: v28.5,53 31.5,50 31.5,45.93 48.84,28.59 v49,28.59
ST_LINK1:USB_RENUM
  Top 0.25: ST_LINK1:R28.1 21.85,48.5 25.5,48.5 26.25,49.25 ST_LINK1:IC3.38
STM_12_INDIC  (via drill 0.35)
  Top 0.2: U1.7 v89,56.5 | v89,62 89,62.65 R11.2 R12.1
  Bottom 0.2: v89,56.5 v89,62
SWDCLK  (via drill 0.35)
  Top 0.25: ST_LINK1:IC3.15 30.25,57.75 29.25,56.75 v27,56.75 ST_LINK1:IC3.26 | v78,51.5 78.2,51.7 U1.24 | SWD1.4 108.67,55.5 v109.5,55.5
  Bottom 0.25: v27,56.75 27.84,55.91 27.84,55.23 28.23,54.84 29.77,54.84 30.16,55.23 30.16,55.59 31.57,57 43.14,57 44.62,58.48 73.52,58.48 78,54 v78,51.5 78,50 80.66,47.34 81.84,47.34 85.44,50.94 85.94,50.94 86,51 105.66,51 105.83,50.84 109.17,50.84 110.5,52.16 110.5,54.5 v109.5,55.5
SWDIO  (via drill 0.35)
  Top 0.25: ST_LINK1:R36.1 19.05,57.5 21.93,57.5 23.18,56.25 ST_LINK1:IC3.27 25.25,56.25 26,55.5 v28.5,55.5 | U1.23 81,52.5 v81.5,53 84.5,53 v85.5,52 | v109.5,56.5 109.23,56.23 SWD1.2
  Bottom 0.25: v28.5,55.5 30.84,57.84 42.84,57.84 44.5,59.5 74.5,59.5 81,53 v81.5,53 | v109.5,56.5 109,56.5 107.5,55.01 104.83,55.01 101.82,52 v85.5,52
SWO  (via drill 0.35)
  Top 0.25: ST_LINK1:IC3.31 28.25,54.25 v29.5,55.5 | v81.5,52 U1.26 81.5,49 v82,48.5 | SWD1.6 109.19,53.69 v109.5,54
  Bottom 0.25: v29.5,55.5 31.44,57.44 43.01,57.44 44.57,59 74,59 81,52 v81.5,52 | v109.5,54 109.18,54 109.17,54.01 108,54.01 107.5,54.5 105,54.5 102,51.5 85.93,51.5 85.77,51.34 84.84,51.34 v82,48.5
TX2  (via drill 0.35)
  Top 0.25: ST_LINK1:IC3.13 32.51,60 v33,60 | v85,56 86.3,57.3 U1.8
  Bottom 0.25: v33,60 36.57,60 37.92,58.65 41.5,58.65 42.44,59.59 42.44,60.44 43.06,61.06 43.94,61.06 44,61 76,61 81,56 v85,56
WHEEL  (via drill 0.35)
  Top 0.25: R15.2 R14.1 100.5,34.35 100.5,39.5 v100,40 | v96.5,58.5 95.5,58.5 94.67,59.33 91.53,59.33 91.37,59.16 91.37,57.37 89.7,55.7 U1.6 | v101.5,53.84 101.5,51.5 99.38,49.38 99.38,45.62 101.5,43.5 v101.5,41.5
  Bottom 0.25: v101.5,41.5 v100,40 | v101.5,53.84 96.84,58.5 v96.5,58.5

## Text on the board
tPlace: Autonomous WaveRunner - OCU / Rev2, 21.01.13 | CAN TERMINATION | OCU | ST LINK | POW | POW | COM | R_OCU | DISP | RED_BTN | USB | WHEEL | GRE_BTN | AUTO_SWITCH | MAN_SWITCH